# Altium PCB Control_Board.PcbDoc (part 2 of 2)
Units mm, origin at the board's own origin, x right, y up, seen from the top; angles counter-clockwise.
Board outline 340 x 220 mm, 2 copper layers (Top Layer, Bottom Layer); 101 components, 44 nets, 469 pads, 64 vias.
Unrouted connection lines stored in the file: 274.
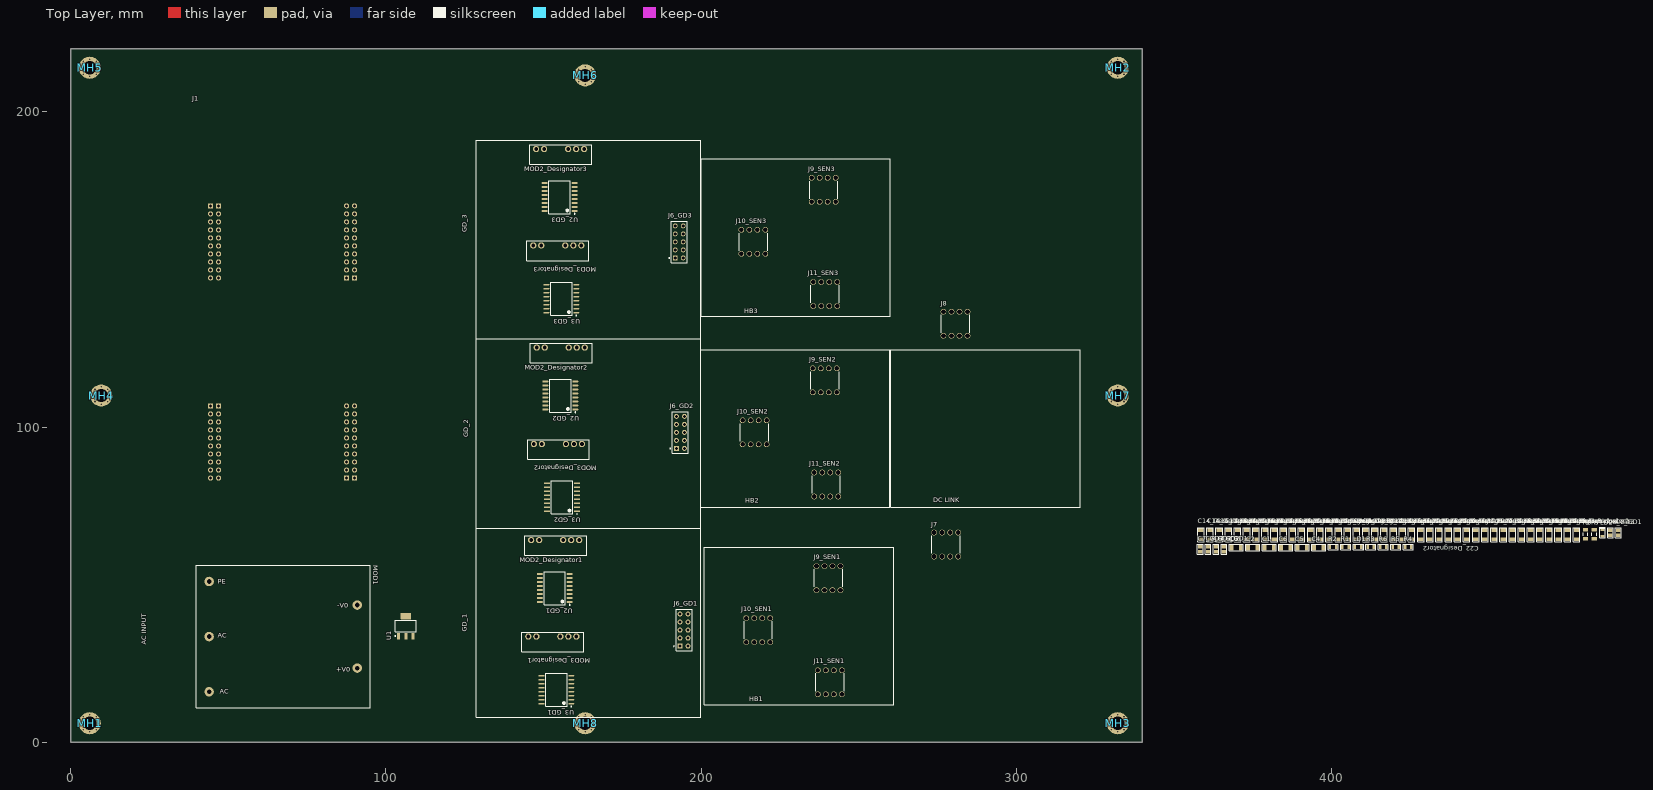
[diagram p0: Top Layer view]

## Part data (continued)
R4 R5 R6: library part CMP-009-00668-1, "Res Thick Film 0805 100 Ohm 1% 0.125W ±100ppm/°C Molded SMD Paper T/R", Case Code (Metric)=2012, Case/Package=0805, Manufacturer="Stackpole Electronics", Manufacturer Part Number=RMCF0805FT100R, Max Operating Temperature=155°C, Max Power Dissipation=125mW, Min Operating Temperature=-55°C, Temperature Coefficient=100ppm/°C, Tolerance=1%, Voltage Rating=150V, Category="Chip SMD Resistors", China RoHS=Non-Compliant, ComponentLink1Description=https://datasheet.octopart.com:443/RMCF0805FT10K0-Stackpole-Electronics-datasheet-182148065.pdf?src-supplier=IHS, ComponentLink1URL=https://datasheet.octopart.com:443/RMCF0805FT10K0-Stackpole-Electronics-datasheet-182148065.pdf?src-supplier=IHS, ComponentLink2Description=https://datasheet.octopart.com:443/RMCF0805FT10K0-Stackpole-Electronics-datasheet-12534581.pdf?src-supplier=Upverter, ComponentLink2URL=https://datasheet.octopart.com:443/RMCF0805FT10K0-Stackpole-Electronics-datasheet-12534581.pdf?src-supplier=Upverter, ComponentLink3Description=https://datasheet.octopart.com:443/RMCF0805FT10K0-Stackpole-Electronics-datasheet-28504820.pdf?src-supplier=Upverter, ComponentLink3URL=https://datasheet.octopart.com:443/RMCF0805FT10K0-Stackpole-Electronics-datasheet-28504820.pdf?src-supplier=Upverter, ComponentLink4Description=https://datasheet.octopart.com:443/RMCF0805FT10K0-Stackpole-Electronics-datasheet-12510902.pdf?src-supplier=Upverter, ComponentLink4URL=https://datasheet.octopart.com:443/RMCF0805FT10K0-Stackpole-Electronics-datasheet-12510902.pdf?src-supplier=Upverter, ComponentLink5Description=https://datasheet.octopart.com:443/RMCF0805FT10K0-Stackpole-Electronics-datasheet-141193804.pdf?src-supplier=Stackpole+Electronics, ComponentLink5URL=https://datasheet.octopart.com:443/RMCF0805FT10K0-Stackpole-Electronics-datasheet-141193804.pdf?src-supplier=Stackpole+Electronics, ComponentLink6Description=https://datasheet.octopart.com:443/RMCF0805FT10K0-Stackpole-Electronics-datasheet-62091608.pdf?src-supplier=Stackpole+Electronics, ComponentLink6URL=https://datasheet.octopart.com:443/RMCF0805FT10K0-Stackpole-Electronics-datasheet-62091608.pdf?src-supplier=Stackpole+Electronics, ComponentLink7Description=https://datasheet.octopart.com:443/RMCF0805FT10K0-Stackpole-Electronics-datasheet-10788263.pdf?src-supplier=Stackpole+Electronics, ComponentLink7URL=https://datasheet.octopart.com:443/RMCF0805FT10K0-Stackpole-Electronics-datasheet-10788263.pdf?src-supplier=Stackpole+Electronics, ComponentLink8Description=https://datasheet.octopart.com:443/RMCF0805FT10K0-Stackpole-Electronics-datasheet-154799224.pdf?src-supplier=Master+Electronics, ComponentLink8URL=https://datasheet.octopart.com:443/RMCF0805FT10K0-Stackpole-Electronics-datasheet-154799224.pdf?src-supplier=Master+Electronics, ComponentLink9Description=https://datasheet.octopart.com:443/RMCF0805FT10K0-Stackpole-Electronics-datasheet-11546843.pdf?src-supplier=Arrow+Electronics, ComponentLink9URL=https://datasheet.octopart.com:443/RMCF0805FT10K0-Stackpole-Electronics-datasheet-11546843.pdf?src-supplier=Arrow+Electronics, ComponentLink10Description=https://datasheet.octopart.com:443/RMCF0805FT10K0-Stackpole-Electronics-datasheet-11547379.pdf?src-supplier=Future+Electronics, ComponentLink10URL=https://datasheet.octopart.com:443/RMCF0805FT10K0-Stackpole-Electronics-datasheet-11547379.pdf?src-supplier=Future+Electronics, ComponentLink11Description=https://datasheet.octopart.com:443/RMCF0805FT10K0-Stackpole-Electronics-datasheet-8359789.pdf?src-supplier=Future+Electronics, ComponentLink11URL=https://datasheet.octopart.com:443/RMCF0805FT10K0-Stackpole-Electronics-datasheet-8359789.pdf?src-supplier=Future+Electronics, ComponentLink12Description=https://datasheet.octopart.com:443/RMCF0805FT10K0-Stackpole-Electronics-datasheet-8324226.pdf?src-supplier=Future+Electronics, ComponentLink12URL=https://datasheet.octopart.com:443/RMCF0805FT10K0-Stackpole-Electronics-datasheet-8324226.pdf?src-supplier=Future+Electronics, ComponentLink13Description=https://datasheet.octopart.com:443/RMCF0805FT10K0-Stackpole-Electronics-datasheet-8088878.pdf?src-supplier=Future+Electronics, ComponentLink13URL=https://datasheet.octopart.com:443/RMCF0805FT10K0-Stackpole-Electronics-datasheet-8088878.pdf?src-supplier=Future+Electronics, ComponentLink14Description=https://datasheet.octopart.com:443/RMCF0805FT10K0-Stackpole-Electronics-datasheet-5313682.pdf?src-supplier=Future+Electronics, ComponentLink14URL=https://datasheet.octopart.com:443/RMCF0805FT10K0-Stackpole-Electronics-datasheet-5313682.pdf?src-supplier=Future+Electronics, ComponentLink15Description=http://sigma.octopart.com:80/15940719/materials_sheet/Stackpole-Electronics-RMCF0805FT10K0.pdf?src-supplier=Compliance+Statements, ComponentLink15URL=http://sigma.octopart.com:80/15940719/materials_sheet/Stackpole-Electronics-RMCF0805FT10K0.pdf?src-supplier=Compliance+Statements, ComponentLink16Description=http://sigma.octopart.com:80/141158211/reach_statement/Stackpole-Electronics-RMCF0805FT10K0.pdf?src-supplier=Compliance+Statements, ComponentLink16URL=http://sigma.octopart.com:80/141158211/reach_statement/Stackpole-Electronics-RMCF0805FT10K0.pdf?src-supplier=Compliance+Statements, ComponentLink17Description=http://sigma.octopart.com:80/141158212/rohs_statement/Stackpole-Electronics-RMCF0805FT10K0.pdf?src-supplier=Compliance+Statements, ComponentLink17URL=http://sigma.octopart.com:80/141158212/rohs_statement/Stackpole-Electronics-RMCF0805FT10K0.pdf?src-supplier=Compliance+Statements, Composition="Thick Film", Contact Plating=Tin, Depth=1.25mm, Design Item ID="100R 1% 1/8W 0805", Features="Automotive AEC-Q200", Height=500µm, Lead Free="Lead Free", Length=2mm, Lifecycle Status=Production, Military Standard=Not, Mounting Technology="Surface Mount", Number of Terminals=2, Number of Terminations=2, Packaging="Cut Tape (CT)", Power Dissipation=125mW, Power Rating=125mW, Pricing="5000=0.00245, 10000=0.00241, 20000=0.00238, 40000=0.00234, 80000=0.0023 (USD)", Radiation Hardening=No, REACH SVHC=Yes, RoHS=Compliant, Schedule B="8533210045, 8533210045", Source=MasterLibrary_SCH.SchLib, Stock=3420000, Width=1.25mm, Working Voltage=150V
R7 R8: library part CMP-009-00660-1, "Res Thick Film 1206 10K Ohm 1% 0.25W(1/4W) ±100ppm/C Pad SMD T/R Automotive AEC-Q200", Case Code (Metric)=3216, Case/Package=1206, Manufacturer="Stackpole Electronics", Manufacturer Part Number=RMCF1206FT10K0, Max Operating Temperature=155°C, Max Power Dissipation=125mW, Min Operating Temperature=-55°C, Temperature Coefficient=100ppm/°C, Tolerance=1%, Voltage Rating=150V, Category="Chip SMD Resistors", China RoHS=Non-Compliant, ComponentLink1Description=https://datasheet.octopart.com:443/RMCF0805FT10K0-Stackpole-Electronics-datasheet-182148065.pdf?src-supplier=IHS, ComponentLink1URL=https://datasheet.octopart.com:443/RMCF0805FT10K0-Stackpole-Electronics-datasheet-182148065.pdf?src-supplier=IHS, ComponentLink2Description=https://datasheet.octopart.com:443/RMCF0805FT10K0-Stackpole-Electronics-datasheet-12534581.pdf?src-supplier=Upverter, ComponentLink2URL=https://datasheet.octopart.com:443/RMCF0805FT10K0-Stackpole-Electronics-datasheet-12534581.pdf?src-supplier=Upverter, ComponentLink3Description=https://datasheet.octopart.com:443/RMCF0805FT10K0-Stackpole-Electronics-datasheet-28504820.pdf?src-supplier=Upverter, ComponentLink3URL=https://datasheet.octopart.com:443/RMCF0805FT10K0-Stackpole-Electronics-datasheet-28504820.pdf?src-supplier=Upverter, ComponentLink4Description=https://datasheet.octopart.com:443/RMCF0805FT10K0-Stackpole-Electronics-datasheet-12510902.pdf?src-supplier=Upverter, ComponentLink4URL=https://datasheet.octopart.com:443/RMCF0805FT10K0-Stackpole-Electronics-datasheet-12510902.pdf?src-supplier=Upverter, ComponentLink5Description=https://datasheet.octopart.com:443/RMCF0805FT10K0-Stackpole-Electronics-datasheet-141193804.pdf?src-supplier=Stackpole+Electronics, ComponentLink5URL=https://datasheet.octopart.com:443/RMCF0805FT10K0-Stackpole-Electronics-datasheet-141193804.pdf?src-supplier=Stackpole+Electronics, ComponentLink6Description=https://datasheet.octopart.com:443/RMCF0805FT10K0-Stackpole-Electronics-datasheet-62091608.pdf?src-supplier=Stackpole+Electronics, ComponentLink6URL=https://datasheet.octopart.com:443/RMCF0805FT10K0-Stackpole-Electronics-datasheet-62091608.pdf?src-supplier=Stackpole+Electronics, ComponentLink7Description=https://datasheet.octopart.com:443/RMCF0805FT10K0-Stackpole-Electronics-datasheet-10788263.pdf?src-supplier=Stackpole+Electronics, ComponentLink7URL=https://datasheet.octopart.com:443/RMCF0805FT10K0-Stackpole-Electronics-datasheet-10788263.pdf?src-supplier=Stackpole+Electronics, ComponentLink8Description=https://datasheet.octopart.com:443/RMCF0805FT10K0-Stackpole-Electronics-datasheet-154799224.pdf?src-supplier=Master+Electronics, ComponentLink8URL=https://datasheet.octopart.com:443/RMCF0805FT10K0-Stackpole-Electronics-datasheet-154799224.pdf?src-supplier=Master+Electronics, ComponentLink9Description=https://datasheet.octopart.com:443/RMCF0805FT10K0-Stackpole-Electronics-datasheet-11546843.pdf?src-supplier=Arrow+Electronics, ComponentLink9URL=https://datasheet.octopart.com:443/RMCF0805FT10K0-Stackpole-Electronics-datasheet-11546843.pdf?src-supplier=Arrow+Electronics, ComponentLink10Description=https://datasheet.octopart.com:443/RMCF0805FT10K0-Stackpole-Electronics-datasheet-11547379.pdf?src-supplier=Future+Electronics, ComponentLink10URL=https://datasheet.octopart.com:443/RMCF0805FT10K0-Stackpole-Electronics-datasheet-11547379.pdf?src-supplier=Future+Electronics, ComponentLink11Description=https://datasheet.octopart.com:443/RMCF0805FT10K0-Stackpole-Electronics-datasheet-8359789.pdf?src-supplier=Future+Electronics, ComponentLink11URL=https://datasheet.octopart.com:443/RMCF0805FT10K0-Stackpole-Electronics-datasheet-8359789.pdf?src-supplier=Future+Electronics, ComponentLink12Description=https://datasheet.octopart.com:443/RMCF0805FT10K0-Stackpole-Electronics-datasheet-8324226.pdf?src-supplier=Future+Electronics, ComponentLink12URL=https://datasheet.octopart.com:443/RMCF0805FT10K0-Stackpole-Electronics-datasheet-8324226.pdf?src-supplier=Future+Electronics, ComponentLink13Description=https://datasheet.octopart.com:443/RMCF0805FT10K0-Stackpole-Electronics-datasheet-8088878.pdf?src-supplier=Future+Electronics, ComponentLink13URL=https://datasheet.octopart.com:443/RMCF0805FT10K0-Stackpole-Electronics-datasheet-8088878.pdf?src-supplier=Future+Electronics, ComponentLink14Description=https://datasheet.octopart.com:443/RMCF0805FT10K0-Stackpole-Electronics-datasheet-5313682.pdf?src-supplier=Future+Electronics, ComponentLink14URL=https://datasheet.octopart.com:443/RMCF0805FT10K0-Stackpole-Electronics-datasheet-5313682.pdf?src-supplier=Future+Electronics, ComponentLink15Description=http://sigma.octopart.com:80/15940719/materials_sheet/Stackpole-Electronics-RMCF0805FT10K0.pdf?src-supplier=Compliance+Statements, ComponentLink15URL=http://sigma.octopart.com:80/15940719/materials_sheet/Stackpole-Electronics-RMCF0805FT10K0.pdf?src-supplier=Compliance+Statements, ComponentLink16Description=http://sigma.octopart.com:80/141158211/reach_statement/Stackpole-Electronics-RMCF0805FT10K0.pdf?src-supplier=Compliance+Statements, ComponentLink16URL=http://sigma.octopart.com:80/141158211/reach_statement/Stackpole-Electronics-RMCF0805FT10K0.pdf?src-supplier=Compliance+Statements, ComponentLink17Description=http://sigma.octopart.com:80/141158212/rohs_statement/Stackpole-Electronics-RMCF0805FT10K0.pdf?src-supplier=Compliance+Statements, ComponentLink17URL=http://sigma.octopart.com:80/141158212/rohs_statement/Stackpole-Electronics-RMCF0805FT10K0.pdf?src-supplier=Compliance+Statements, ComponentLink18Description=https://datasheet.octopart.com:443/RMCF1206FT10K0-Stackpole-Electronics-datasheet-182148065.pdf?src-supplier=IHS, ComponentLink18URL=https://datasheet.octopart.com:443/RMCF1206FT10K0-Stackpole-Electronics-datasheet-182148065.pdf?src-supplier=IHS, ComponentLink19Description=https://datasheet.octopart.com:443/RMCF1206FT10K0-Stackpole-Electronics-datasheet-141193804.pdf?src-supplier=Master+Electronics, ComponentLink19URL=https://datasheet.octopart.com:443/RMCF1206FT10K0-Stackpole-Electronics-datasheet-141193804.pdf?src-supplier=Master+Electronics, ComponentLink20Description=https://datasheet.octopart.com:443/RMCF1206FT10K0-Stackpole-Electronics-datasheet-189104163.pdf?src-supplier=Master+Electronics, ComponentLink20URL=https://datasheet.octopart.com:443/RMCF1206FT10K0-Stackpole-Electronics-datasheet-189104163.pdf?src-supplier=Master+Electronics, ComponentLink21Description=https://datasheet.octopart.com:443/RMCF1206FT10K0-Stackpole-Electronics-datasheet-116606903.pdf?src-supplier=Master+Electronics, ComponentLink21URL=https://datasheet.octopart.com:443/RMCF1206FT10K0-Stackpole-Electronics-datasheet-116606903.pdf?src-supplier=Master+Electronics, ComponentLink22Description=https://datasheet.octopart.com:443/RMCF1206FT10K0-Stackpole-Electronics-datasheet-62091608.pdf?src-supplier=Upverter, ComponentLink22URL=https://datasheet.octopart.com:443/RMCF1206FT10K0-Stackpole-Electronics-datasheet-62091608.pdf?src-supplier=Upverter, ComponentLink23Description=https://datasheet.octopart.com:443/RMCF1206FT10K0-Stackpole-Electronics-datasheet-28504820.pdf?src-supplier=Upverter, ComponentLink23URL=https://datasheet.octopart.com:443/RMCF1206FT10K0-Stackpole-Electronics-datasheet-28504820.pdf?src-supplier=Upverter, ComponentLink24Description=https://datasheet.octopart.com:443/RMCF1206FT10K0-Stackpole-Electronics-datasheet-12534581.pdf?src-supplier=Stackpole+Electronics, ComponentLink24URL=https://datasheet.octopart.com:443/RMCF1206FT10K0-Stackpole-Electronics-datasheet-12534581.pdf?src-supplier=Stackpole+Electronics, ComponentLink25Description=https://datasheet.octopart.com:443/RMCF1206FT10K0-Stackpole-Electronics-datasheet-10788263.pdf?src-supplier=Stackpole+Electronics, ComponentLink25URL=https://datasheet.octopart.com:443/RMCF1206FT10K0-Stackpole-Electronics-datasheet-10788263.pdf?src-supplier=Stackpole+Electronics, ComponentLink26Description=https://datasheet.octopart.com:443/RMCF1206FT10K0-Stackpole-Electronics-datasheet-11546843.pdf?src-supplier=Arrow+Electronics, ComponentLink26URL=https://datasheet.octopart.com:443/RMCF1206FT10K0-Stackpole-Electronics-datasheet-11546843.pdf?src-supplier=Arrow+Electronics, ComponentLink27Description=https://datasheet.octopart.com:443/RMCF1206FT10K0-Stackpole-Electronics-datasheet-11547379.pdf?src-supplier=Future+Electronics, ComponentLink27URL=https://datasheet.octopart.com:443/RMCF1206FT10K0-Stackpole-Electronics-datasheet-11547379.pdf?src-supplier=Future+Electronics, ComponentLink28Description=https://datasheet.octopart.com:443/RMCF1206FT10K0-Stackpole-Electronics-datasheet-8359789.pdf?src-supplier=Future+Electronics, ComponentLink28URL=https://datasheet.octopart.com:443/RMCF1206FT10K0-Stackpole-Electronics-datasheet-8359789.pdf?src-supplier=Future+Electronics, ComponentLink29Description=https://datasheet.octopart.com:443/RMCF1206FT10K0-Stackpole-Electronics-datasheet-8324226.pdf?src-supplier=Future+Electronics, ComponentLink29URL=https://datasheet.octopart.com:443/RMCF1206FT10K0-Stackpole-Electronics-datasheet-8324226.pdf?src-supplier=Future+Electronics, ComponentLink30Description=http://sigma.octopart.com:80/15940719/materials_sheet/Stackpole-Electronics-RMCF1206FT10K0.pdf?src-supplier=Compliance+Statements, ComponentLink30URL=http://sigma.octopart.com:80/15940719/materials_sheet/Stackpole-Electronics-RMCF1206FT10K0.pdf?src-supplier=Compliance+Statements, ComponentLink31Description=http://sigma.octopart.com:80/141158212/rohs_statement/Stackpole-Electronics-RMCF1206FT10K0.pdf?src-supplier=Compliance+Statements, ComponentLink31URL=http://sigma.octopart.com:80/141158212/rohs_statement/Stackpole-Electronics-RMCF1206FT10K0.pdf?src-supplier=Compliance+Statements, ComponentLink32Description=http://sigma.octopart.com:80/141158211/reach_statement/Stackpole-Electronics-RMCF1206FT10K0.pdf?src-supplier=Compliance+Statements, ComponentLink32URL=http://sigma.octopart.com:80/141158211/reach_statement/Stackpole-Electronics-RMCF1206FT10K0.pdf?src-supplier=Compliance+Statements, Composition="Thick Film", Contact Plating=Tin, Depth=1.25mm, Design Item ID="10K 1% 1/4W 1206", Features="Automotive AEC-Q200", Height=500µm, Lead Free="Lead Free", Length=2mm, Lifecycle Status=Production, Military Standard=Not, Mounting Technology="Surface Mount", Number of Terminals=2, Number of Terminations=2, Packaging="Cut Tape (CT)", Power Dissipation=125mW, Power Rating=125mW, Pricing="5000=0.00245, 10000=0.00241, 20000=0.00238, 40000=0.00234, 80000=0.0023 (USD)", Radiation Hardening=No, REACH SVHC=Yes, RoHS=Compliant, Schedule B="8533210045, 8533210045", Source=MasterLibrary_SCH.SchLib, Stock=3420000, Width=1.25mm, Working Voltage=150V
U1: library part CMP-302-000001-1, "Texas Instruments LM1117MP-3.3/NOPB. Ldo Voltage Regulator, 3.3V, 0.8A, SOT-223-4, Full Reel", Manufacturer=SOT-223, Manufacturer Lifecycle Status=ACTIVE, Manufacturer Part Number=LM1117MP-3.3/NOPB, Max Input Voltage=15V, Max Operating Temperature=125°C, Max Output Current=800mA, Max Supply Voltage=10V, Min Input Voltage=2.6V, Min Operating Temperature=0°C, Min Supply Voltage=4.75V, Nominal Output Voltage=3.3V, Package Reference=Tin, Height=1.8mm, Lead Free="Lead Free", Length=6.5mm, Lifecycle Status=Production, Manufacturer Order Number="LDO Voltage Regulators", Min Current Limit=800mA, Mount="Surface Mount", Number of Channels=1, Number of Outputs=1, Parameter 6="Texas Instruments", Source=800mA
U2_GD1 U2_GD2 U2_GD3 U3_GD1 U3_GD2 U3_GD3: library part CMP-309-000001-2, "Gate Driver Single Channel for SiC/IGBT 10A 5.7kV 16-Pin SOIC T/R", Case/Package=SOIC, Manufacturer="Texas Instruments", Manufacturer Lifecycle Status=ACTIVE, Manufacturer Part Number=UCC21710QDWRQ1, Category="Integrated Circuits (ICs)", ComponentLink1Description=https://octopart.com:443/opatz8j6/c1?t=2Ae8CYxUiKwwUnaAX1oXuDSPwO_i-MIfE4deJ_XvXtHVTVYVZx9tgFB0fYlzg1x4Sa1FF-SXVXU5tzE2ofxkzrGr1RLbzye29Caa-fQ0ONbIHExv9lM6c6k7X9PVt_IVgvBE_C6n-D2BVECotO-ctuGrZih5w-ukil919FlMD0qnLFwI1OTZtrTHd9y-8_dLh9JFKe0IM-hKQeF-gA00x0rc95AVO7XLhrrNps-hMPC4fMVTmdk_JUX9ambxvphSmuH9qLML26GYMMgQ3Yml-wiDg2USMR9Wdws-ZC-Hcutrtwa5BnM5chwDXC9-NOxHlBmk1zJEqMy2MURJlK19_PFoIfpMasCg-KFUNJdrYzD3H6Zmvyob5xjvNjRz-JVhWAt5jAg8iYMI&src-supplier=Texas+Instruments, ComponentLink1URL=https://octopart.com:443/opatz8j6/c1?t=2Ae8CYxUiKwwUnaAX1oXuDSPwO_i-MIfE4deJ_XvXtHVTVYVZx9tgFB0fYlzg1x4Sa1FF-SXVXU5tzE2ofxkzrGr1RLbzye29Caa-fQ0ONbIHExv9lM6c6k7X9PVt_IVgvBE_C6n-D2BVECotO-ctuGrZih5w-ukil919FlMD0qnLFwI1OTZtrTHd9y-8_dLh9JFKe0IM-hKQeF-gA00x0rc95AVO7XLhrrNps-hMPC4fMVTmdk_JUX9ambxvphSmuH9qLML26GYMMgQ3Yml-wiDg2USMR9Wdws-ZC-Hcutrtwa5BnM5chwDXC9-NOxHlBmk1zJEqMy2MURJlK19_PFoIfpMasCg-KFUNJdrYzD3H6Zmvyob5xjvNjRz-JVhWAt5jAg8iYMI&src-supplier=Texas+Instruments, ComponentLink2Description=https://datasheet.octopart.com:443/UCC21710QDWRQ1-Texas-Instruments-datasheet-184244563.pdf?src-supplier=LCSC, ComponentLink2URL=https://datasheet.octopart.com:443/UCC21710QDWRQ1-Texas-Instruments-datasheet-184244563.pdf?src-supplier=LCSC, ComponentLink3Description=http://sigma.octopart.com:80/reach_statement/Texas-Instruments-company-64.pdf?src-supplier=Compliance+Statements, ComponentLink3URL=http://sigma.octopart.com:80/reach_statement/Texas-Instruments-company-64.pdf?src-supplier=Compliance+Statements, ComponentLink4Description=http://sigma.octopart.com:80/conflict_mineral_statement/Texas-Instruments-company-63.pdf?src-supplier=Compliance+Statements, ComponentLink4URL=http://sigma.octopart.com:80/conflict_mineral_statement/Texas-Instruments-company-63.pdf?src-supplier=Compliance+Statements, Design Item ID="IC: UCC21710QDWRQ1", Height=2.65mm, Length=10.3mm, Lifecycle Status=Production, Pins=16, Pricing="1=7,06, 10=5,443, 25=5,0392, 100=4,595, 250=4,38324, 500=4,2556, 1000=4,15057 (USD)", RoHS=Compliant, Schedule B="8542390000, 8542390000", Source=MasterLibrary_SCH.SchLib, Stock=2904, Thickness=2.35mm, Width=7.5mm

## Via types
v1: diameter 0.7, hole 0.5, Top Layer to Bottom Layer, tented both sides, 64 vias

## Nets (pads, with @x,y where several pads share a name; then routed paths per layer and width w, separated by ;. In a path a pad name is that pad's centre, name@x,y a point inside that pad or via, vN(x,y) a via of type N, cw(c..) or ccw(c..) an arc to the next point about the centre after c; other vN are vias at no path point)
+3V3: C4.2 C5.2 J1.1 J1.41 LD2.2 U1.2 U1.4
+5V: C1.2 C2.2 C3.2 C6.2 C7_GD1.2 C7_GD2.2 C7_GD3.2 C8_GD1.2 C8_GD2.2 C8_GD3.2 C11_Designator1.2 C11_Designator2.2 C11_Designator3.2 C12_Designator1.2 C12_Designator2.2 C12_Designator3.2 C13_Designator1.2 C13_Designator2.2 C13_Designator3.2 C18_Designator1.2 C18_Designator2.2 C18_Designator3.2 C19_Designator1.2 C19_Designator2.2 C19_Designator3.2 C20_Designator1.2 C20_Designator2.2 C20_Designator3.2 J1.21 J1.61 LD1.2 MOD1.3 MOD2_Designator1.1 MOD2_Designator2.1 MOD2_Designator3.1 MOD3_Designator1.1 MOD3_Designator2.1 MOD3_Designator3.1 R1.2 R2.2 R3.2 U1.3 U2_GD1.5 U2_GD2.5 U2_GD3.5 U3_GD1.5 U3_GD2.5 U3_GD3.5
GD_\F\L\T\1: J1.78 R1.1
GD_\F\L\T\2: J1.79 R2.1
GD_\F\L\T\3: J1.80 R3.1
GD_EN: J1.77 R4.1 R5.1 R6.1
GD_EN1: R4.2
GD_EN2: R5.2
GD_EN3: R6.2
GD_HS_PWM1: J1.39
GD_HS_PWM2: J1.37
GD_HS_PWM3: J1.35
GD_HS_TEMP1: J1.25
GD_HS_TEMP2: J1.27
GD_HS_TEMP3: J1.29
GD_LS_PWM1: J1.40
GD_LS_PWM2: J1.38
GD_LS_PWM3: J1.36
GD_LS_TEMP1: J1.26
GD_LS_TEMP2: J1.28
GD_LS_TEMP3: J1.30
GND: C1.1 C2.1 C3.1 C4.1 C5.1 C6.1 MOD1.1 MOD1.6 R7.1 R8.1 U1.1
HV_GND_SEN1: J8.1 J11_SEN1.1 J11_SEN2.1 J11_SEN3.1
HV_PWR_SEN1: J7.1 J9_SEN1.1 J9_SEN2.1 J9_SEN3.1
LS_TEMP_GD1: J6_GD1.9 U3_GD1.16
LS_TEMP_GD2: J6_GD2.9 U3_GD2.16
LS_TEMP_GD3: J6_GD3.9 U3_GD3.16
NetLD1_1: LD1.1 R7.2
NetLD2_1: LD2.1 R8.2
NetMOD1_4: MOD1.4
NetMOD1_5: MOD1.5
SW_GD1: C9_Designator1.1 C10_Designator1.1 C14_Designator1.2 C15_Designator1.2 MOD2_Designator1.6 U2_GD1.16
SW_GD2: C9_Designator2.1 C10_Designator2.1 C14_Designator2.2 C15_Designator2.2 MOD2_Designator2.6 U2_GD2.16
SW_GD3: C9_Designator3.1 C10_Designator3.1 C14_Designator3.2 C15_Designator3.2 MOD2_Designator3.6 U2_GD3.16
VDD_HS_GD_HB_GD1: C9_Designator1.2 C10_Designator1.2 J6_GD1.2 MOD2_Designator1.7 U2_GD1.15
VDD_HS_GD_HB_GD2: C9_Designator2.2 C10_Designator2.2 J6_GD2.2 MOD2_Designator2.7 U2_GD2.15
VDD_HS_GD_HB_GD3: C9_Designator3.2 C10_Designator3.2 J6_GD3.2 MOD2_Designator3.7 U2_GD3.15
VDD_LS_GD_HB_GD1: C16_Designator1.2 C17_Designator1.2 J6_GD1.3 MOD3_Designator1.7 U3_GD1.15
VDD_LS_GD_HB_GD2: C16_Designator2.2 C17_Designator2.2 J6_GD2.3 MOD3_Designator2.7 U3_GD2.15
VDD_LS_GD_HB_GD3: C16_Designator3.2 C17_Designator3.2 J6_GD3.3 MOD3_Designator3.7 U3_GD3.15
VEE_HS_GD_HB_GD1: C14_Designator1.1 C15_Designator1.1 J6_GD1.1 MOD2_Designator1.5 U2_GD1.9
VEE_HS_GD_HB_GD2: C14_Designator2.1 C15_Designator2.1 J6_GD2.1 MOD2_Designator2.5 U2_GD2.9
VEE_HS_GD_HB_GD3: C14_Designator3.1 C15_Designator3.1 J6_GD3.1 MOD2_Designator3.5 U2_GD3.9
VEE_LS_GD_HB_GD1: C7_GD1.1 C7_GD2.1 C7_GD3.1 C8_GD1.1 C8_GD2.1 C8_GD3.1 C11_Designator1.1 C11_Designator2.1 C11_Designator3.1 C12_Designator1.1 C12_Designator2.1 C12_Designator3.1 C13_Designator1.1 C13_Designator2.1 C13_Designator3.1 C16_Designator1.1 C16_Designator2.1 C16_Designator3.1 C17_Designator1.1 C17_Designator2.1 C17_Designator3.1 C18_Designator1.1 C18_Designator2.1 C18_Designator3.1 C19_Designator1.1 C19_Designator2.1 C19_Designator3.1 C20_Designator1.1 C20_Designator2.1 C20_Designator3.1 C21_Designator1.1 C21_Designator1.2 C21_Designator2.1 C21_Designator2.2 C21_Designator3.1 C21_Designator3.2 C22_Designator1.1 C22_Designator1.2 C22_Designator2.1 C22_Designator2.2 C22_Designator3.1 C22_Designator3.2 J1.20 J1.22 J1.60 J1.62 J6_GD1.4 J6_GD1.5 J6_GD1.6 J6_GD1.7 J6_GD1.8 J6_GD1.10 J6_GD2.4 J6_GD2.5 J6_GD2.6 J6_GD2.7 J6_GD2.8 J6_GD2.10 J6_GD3.4 J6_GD3.5 J6_GD3.6 J6_GD3.7 J6_GD3.8 J6_GD3.10 MOD2_Designator1.2 MOD2_Designator2.2 MOD2_Designator3.2 MOD3_Designator1.2 MOD3_Designator1.5 MOD3_Designator1.6 MOD3_Designator2.2 MOD3_Designator2.5 MOD3_Designator2.6 MOD3_Designator3.2 MOD3_Designator3.5 MOD3_Designator3.6 U2_GD1.6 U2_GD2.6 U2_GD3.6 U3_GD1.6 U3_GD1.8 U3_GD1.9 U3_GD2.6 U3_GD2.8 U3_GD2.9 U3_GD3.6 U3_GD3.8 U3_GD3.9
pads on no net: J1.2 J1.3 J1.4 J1.5 J1.6 J1.7 J1.8 J1.9 J1.10 J1.11 J1.12 J1.13 J1.14 J1.15 J1.16 J1.17 J1.18 J1.19 J1.23 J1.24 J1.31 J1.32 J1.33 J1.34 J1.42 J1.43 J1.44 J1.45 J1.46 J1.47 J1.48 J1.49 J1.50 J1.51 J1.52 J1.53 J1.54 J1.55 J1.56 J1.57 J1.58 J1.59 J1.63 J1.64 J1.65 J1.66 J1.67 J1.68 J1.69 J1.70 J1.71 J1.72 J1.73 J1.74 J1.75 J1.76 J10_SEN1.1 J10_SEN2.1 J10_SEN3.1 MH1.1 MH2.1 MH3.1 MH4.1 MH5.1 MH6.1 MH7.1 MH8.1 U2_GD1.1 U2_GD1.2 U2_GD1.3 U2_GD1.4 U2_GD1.7 U2_GD1.8 U2_GD1.10 U2_GD1.11 U2_GD1.12 U2_GD1.13 U2_GD1.14 U2_GD2.1 U2_GD2.2 U2_GD2.3 U2_GD2.4 U2_GD2.7 U2_GD2.8 U2_GD2.10 U2_GD2.11 U2_GD2.12 U2_GD2.13 U2_GD2.14 U2_GD3.1 U2_GD3.2 U2_GD3.3 U2_GD3.4 U2_GD3.7 U2_GD3.8 U2_GD3.10 U2_GD3.11 U2_GD3.12 U2_GD3.13 U2_GD3.14 U3_GD1.1 U3_GD1.2 U3_GD1.3 U3_GD1.4 U3_GD1.7 U3_GD1.10 U3_GD1.11 U3_GD1.12 U3_GD1.13 U3_GD1.14 U3_GD2.1 U3_GD2.2 U3_GD2.3 U3_GD2.4 U3_GD2.7 U3_GD2.10 U3_GD2.11 U3_GD2.12 U3_GD2.13 U3_GD2.14 U3_GD3.1 U3_GD3.2 U3_GD3.3 U3_GD3.4 U3_GD3.7 U3_GD3.10 U3_GD3.11 U3_GD3.12 U3_GD3.13 U3_GD3.14
copper on no net:
  other v1: 6,3.25 163.189,3.25 332.189,3.25 4,4 8,4 161.189,4 165.189,4 330.189,4 334.189,4 3.25,6 8.75,6 160.439,6 165.939,6 329.439,6 334.939,6 4,8 8,8 161.189,8 165.189,8 330.189,8 334.189,8 6,8.75 163.189,8.75 332.189,8.75 9.652,107.25 332.189,107.25 7.652,108 11.652,108 330.189,108 334.189,108 6.902,110 12.402,110 329.439,110 334.939,110 7.652,112 11.652,112 330.189,112 334.189,112 9.652,112.75 332.189,112.75 163.189,208.832 161.189,209.582 165.189,209.582 6,211.25 332.189,211.25 160.439,211.582 165.939,211.582 4,212 8,212 330.189,212 334.189,212 161.189,213.582 165.189,213.582 3.25,214 8.75,214 329.439,214 334.939,214 163.189,214.332 4,216 8,216 330.189,216 334.189,216 6,216.75 332.189,216.75

## Silkscreen, mask and mechanical layers (free items; w line width, h text height)
Top Overlay:
  lines w0.254: 128.651,67.945 199.954,67.945 ; 128.651,67.945 128.651,128.016 ; 128.651,67.945 199.954,67.945 ; 128.651,67.945 128.651,7.874 199.954,7.874 199.954,67.945 ; 128.651,128.016 199.954,128.016 ; 128.651,128.016 128.651,191.008 199.954,191.008 199.954,128.016 ; 128.651,128.016 199.954,128.016 ; 199.954,67.945 199.954,128.016 ; 199.898,74.549 259.898,74.549 259.898,124.549 199.898,124.549 199.898,74.549 ; 199.969,135.128 259.969,135.128 259.969,185.128 199.969,185.128 199.969,135.128 ; 201.041,11.811 261.041,11.811 261.041,61.811 201.041,61.811 201.041,11.811 ; 260.223,74.549 320.223,74.549 320.223,124.549 260.223,124.549 260.223,74.549
  text "GD_3" at 125.603,161.798 h1.52 r90
  text "HB3" at 213.741,136.144 h1.52
  text "GD_2" at 126.111,96.774 h1.52 r90
  text "DC LINK" at 273.685,76.2 h1.52
  text "HB2" at 213.995,75.946 h1.52
  text "GD_1" at 125.603,35.052 h1.52 r90
  text "AC INPUT" at 23.876,30.988 h1.52 r90
  text "HB1" at 215.265,12.954 h1.52
Board Shape:
  the board outline again, w0.254

## Text inside footprints (layer, text, board x,y; h text height)
MOD1: Top Overlay "+V0" at 84.271,22.423 h1.52; Top Overlay "-V0" at 84.525,42.616 h1.52; Top Overlay "AC" at 47.187,15.438 h1.52; Top Overlay "AC" at 46.679,33.091 h1.52; Top Overlay "PE" at 46.552,50.236 h1.52